# EAGLE board VCA-R2 (EAGLE 7.7.0)
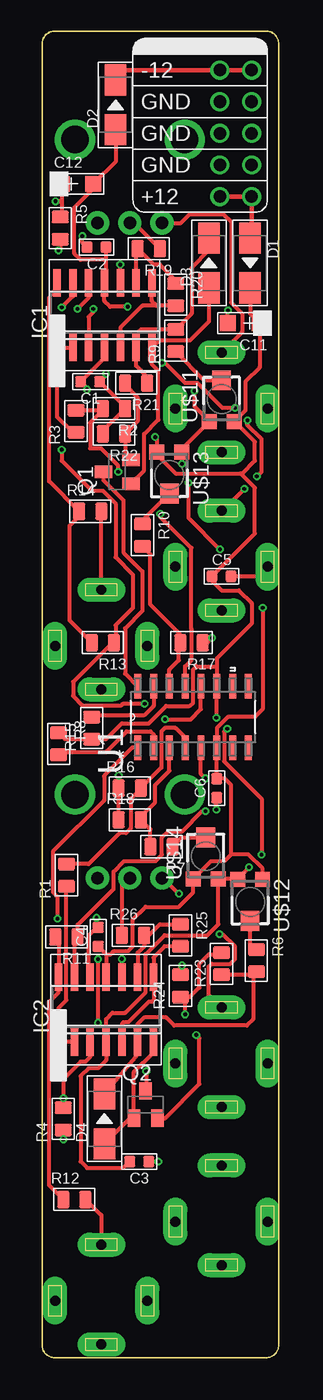
[diagram p0: board, top side]
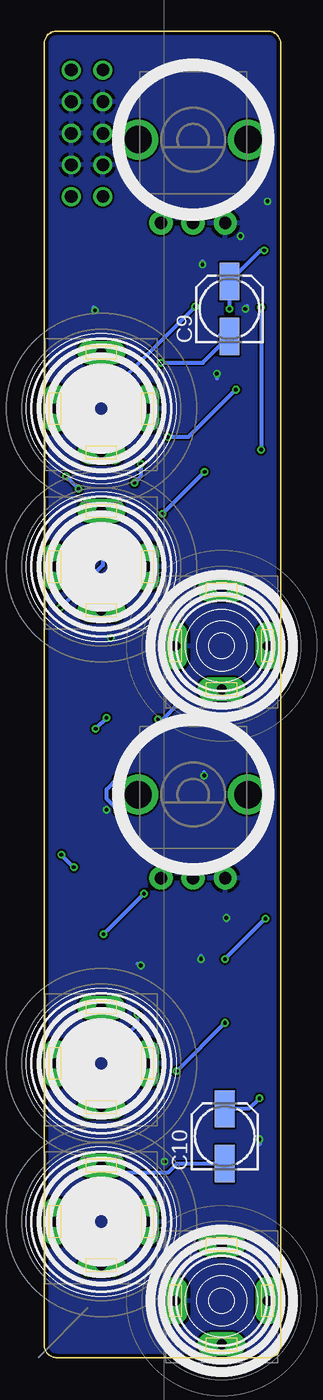
[diagram p1: board, bottom side, seen from below]

Size 18.98 x 106.5 mm. Coordinates in mm from the lower left corner, seen from the top.
Copper layers (1*16): Top 0.035mm / dielectric 1.5mm / Bottom 0.035mm
Design rules "ITEADstudio_DRC": minimum track width 6mil, minimum drill 12mil, track to track 6mil, track to pad 6mil, pad to pad 6mil, via to via 6mil, smd to smd 0mil, copper to edge 10mil, drill to drill 10mil, minimum pad ring 10mil, minimum via ring 6mil, stop-mask expansion 2mil, vias tented up to drill 100mil, thermal gap 10mil
Net classes: 0 default: width 0.305 mm; 1 heavypower: width 0.381 mm

## Footprints (pad centres in the part's own frame; a part is rotated, then mirrored left to right if it is on the bottom)
C0603 = smd 0.889 x 0.889: 1 -0.762,0; 2 0.762,0
153CLV-0505 = smd 3 x 1.6: + 2.2,0; - -2.2,0
AVX-A = smd 1.27 x 1.27: + -1.27,0; - 1.27,0
DO-214AC = smd 2.5 x 1.7: 1 -2,0; 2 2,0
SO14 = smd 0.6 x 2.2: 1 -3.81,-2.6; 2 -2.54,-2.6; 3 -1.27,-2.6; 4 0,-2.6; 5 1.27,-2.6; 6 2.54,-2.6; 7 3.81,-2.6; 8 3.81,2.6; 9 2.54,2.6; 10 1.27,2.6; 11 0,2.6; 12 -1.27,2.6; 13 -2.54,2.6; 14 -3.81,2.6
SOT23-BEC = smd 1 x 1.4: B -0.95,-1.1; C 0,1.1; E 0.95,-1.1
C0805 = smd 1.016 x 1.397: 1 -0.889,0; 2 0.889,0
SOIC127P620X175-16N = smd 1.981 x 0.559: 1 -2.464,4.445; 2 -2.464,3.175; 3 -2.464,1.905; 4 -2.464,0.635; 5 -2.464,-0.635; 6 -2.464,-1.905; 7 -2.464,-3.175; 8 -2.464,-4.445; 9 2.464,-4.445; 10 2.464,-3.175; 11 2.464,-1.905; 12 2.464,-0.635; 13 2.464,0.635; 14 2.464,1.905; 15 2.464,3.175; 16 2.464,4.445
OG-POTS_ALPS_POT_VERTICAL = drill 1 pad 1.88: P$1 -2.58,-6.7; P$2 0,-6.7; P$3 2.58,-6.7 | drill 2.2 pad 3.175: P$4 4.4,0; P$5 -4.4,0
3.5MM-JACK-SWITCH-13MM-INPUT = drill 0.8 pad 1.93 long: RING@3 -3.7,0; SECOND@3 0,-3.5; SWITCH@3 3.7,0; TIP@3 0,4.5
3.5MM-JACK-SWITCH-13MM-OUTPUT = drill 0.8 pad 1.93 long: RING@3 -3.7,0; SECOND@3 0,-3.5; SWITCH@3 3.7,0; TIP@3 0,4.5
POWER_10 = drill 1.016: 1 -5.08,-1.27; 2 -5.08,1.27; 3 -2.54,-1.27; 4 -2.54,1.27; 5 0,-1.27; 6 0,1.27; 7 2.54,-1.27; 8 2.54,1.27; 9 5.08,-1.27; 10 5.08,1.27
TC33X = smd 1.2 x 1.2: 1 -1,-1.825; 3 1,-1.825 | smd 1.5 x 1.6: 2 0,1.5

## Placement (x,y rotation side)
C1  100nF  [C0603]  3.86,78.36 180 top
C2  100nF  [C0603]  4.37,89.15 180 top
C3  100nF  [C0603]  7.8,15.75 180 top
C4  100nF  [C0603]  4.49,33.78 90 top
C5  100nF  [C0603]  14.4,62.74 0 top
C6  100nF  [C0603]  14.02,45.72 90 top
C9  1uF-BIDIR  [153CLV-0505]  4.11,84.2 90 bottom
C10  1uF-BIDIR  [153CLV-0505]  4.49,17.78 90 bottom
C11  10uF  [AVX-A]  16.18,83.06 180 top
C12  10uF  [AVX-A]  2.84,94.23 0 top
D1  MRA4004T3G  [DO-214AC]  16.69,87.88 270 top
D2  MRA4004T3G  [DO-214AC]  5.89,100.58 90 top
D3  MRA4004T3G  [DO-214AC]  13.38,87.88 90 top
D4  MRA4004T3G  [DO-214AC]  5,19.18 90 top
IC1  TL074D  [SO14]  5,83.69 0 top
IC2  TL074D  [SO14]  5.13,27.94 0 top
Q1  MMBT3906LT1SMD  [SOT23-BEC]  6.02,71.12 90 top
Q2  MMBT3906LT1SMD  [SOT23-BEC]  8.3,20.32 0 top
R1  49.9K  [C0805]  1.95,38.73 90 top
R2  499  [C0805]  5.76,76.2 180 top
R3  49.9K  [C0805]  2.72,75.18 90 top
R4  220K  [C0805]  1.7,19.18 90 top
R5  220K  [C0805]  1.45,90.68 270 top
R6  220K  [C0805]  17.19,31.88 270 top
R7  220K  [C0805]  9.57,41.02 180 top
R8  249K  [C0805]  1.32,49.28 270 top
R9  220K  [C0805]  10.72,81.66 90 top
R10  220K  [C0805]  8.05,66.04 270 top
R11  30.1K  [C0805]  1.95,33.78 180 top
R12  100  [C0805]  2.59,12.7 0 top
R13  30.1K  [C0805]  4.87,57.4 180 top
R14  100  [C0805]  3.86,67.94 0 top
R15  249K  [C0805]  3.99,50.55 90 top
R16  499  [C0805]  7.03,45.72 0 top
R17  499  [C0805]  11.99,57.4 180 top
R18  499  [C0805]  7.03,43.18 0 top
R19  100K  [C0805]  8.56,89.03 180 top
R20  2K  [C0805]  10.72,85.34 270 top
R21  2K  [C0805]  7.54,78.23 180 top
R22  200  [C0805]  5.76,74.17 180 top
R23  2K  [C0805]  14.4,31.62 90 top
R24  200  [C0805]  11.1,29.84 90 top
R25  2K  [C0805]  11.1,33.91 270 top
R26  100K  [C0805]  7.29,33.91 0 top
U1  LM13700M  [SOIC127P620X175-16N]  12.11,51.44 90 top
U$1  EURORACK_PCB4HP  [EURORACK4HPPCB]  19.48,0 0 bottom
U$2  100K  [OG-POTS_ALPS_POT_VERTICAL]  7.03,97.79 0 bottom
U$3  100K  [OG-POTS_ALPS_POT_VERTICAL]  7.03,45.21 0 bottom
U$4  PJ-341  [3.5MM-JACK-SWITCH-13MM-INPUT]  14.4,63.5 0 bottom
U$5  PJ-341  [3.5MM-JACK-SWITCH-13MM-INPUT]  14.4,76.2 0 bottom
U$6  PJ-341  [3.5MM-JACK-SWITCH-13MM-INPUT]  14.4,10.92 0 bottom
U$7  PJ-341  [3.5MM-JACK-SWITCH-13MM-INPUT]  14.4,23.62 0 bottom
U$8  PJ-341  [3.5MM-JACK-SWITCH-13MM-OUTPUT]  4.75,57.15 0 bottom
U$9  PJ-341  [3.5MM-JACK-SWITCH-13MM-OUTPUT]  4.75,4.57 0 bottom
U$10  POWER_SIMPLE10  [POWER_10]  15.54,98.3 270 top
U$11  100K  [TC33X]  14.4,76.96 0 top
U$12  100K  [TC33X]  16.69,36.58 180 top
U$13  100K  [TC33X]  10.21,70.87 180 top
U$14  100K  [TC33X]  13.13,40.26 0 top

## Library data of the parts
C1-C6 C11 C12 R1-R26 = OPL
C9 C10 U$11-U$14 = adafruit
D1-D4 = OPL; MF: VISHAY; MPN: US1G-E3/5AT; OC_FARNELL: 9551824
IC1 IC2 U$1 U$10 = EurorackModularParts
Q1 Q2 = transistor-pnp
U1 = FarnellThings; MPN: LM13700M; OC_FARNELL: 1468910; OC_NEWARK: 41K3505; PACKAGE: SOIC-16; SUPPLIER: National Semiconductor
U$2 = EurorackModularParts; DESC: Gain A
U$3 = EurorackModularParts; DESC: Gain B
U$4 = EurorackModularParts; DESC: Input A; MPN: PJ-341
U$5 = EurorackModularParts; DESC: CV A; MPN: PJ-341
U$6 = EurorackModularParts; DESC: Input B; MPN: PJ-341
U$7 = EurorackModularParts; DESC: CV B; MPN: PJ-341
U$8 = EurorackModularParts; DESC: Output A; MPN: PJ-341
U$9 = EurorackModularParts; DESC: Output B; MPN: PJ-341

## Nets
12V: C1.2 C3.2 C5.1 C11.+ D1.2 IC1.4 IC2.4 R8.1 R15.1 U1.11 U$11.3 U$12.3 U$13.3 U$14.3
-12V: C2.1 C4.1 C6.2 C12.- D2.1 IC1.11 IC2.11 U1.6 U$11.1 U$12.1 U$13.1 U$14.1
CV_IN_A: Q1.C U1.16
CV_IN_B: Q2.C U1.1
GND: C1.1 C2.2 C3.1 C4.2 C5.2 C6.1 C11.- C12.+ IC1.10 IC1.12 IC2.10 IC2.12 R2.1 R4.1 R5.1 R16.1 R17.1 R18.1 R22.2 R24.2 U$2.P$3 U$3.P$3 U$4.RING@3 U$4.SWITCH@3 U$5.RING@3 U$5.SWITCH@3 U$6.RING@3 U$6.SWITCH@3 U$7.RING@3 U$7.SWITCH@3 U$8.RING@3 U$9.RING@3 U$10.3 U$10.4 U$10.5 U$10.6 U$10.7 U$10.8
N$1: R14.2 U$8.TIP@3
N$2: IC1.14 R13.2 R14.1
N$3: R8.2 U1.2
N$4: R15.2 U1.15
N$5: R12.2 U$9.TIP@3
N$6: IC2.14 R11.2 R12.1
N$7: R19.1 U$2.P$2
N$8: R10.1 U$13.2
N$9: R9.1 U$11.2
N$10: R7.1 U$14.2
N$11: R6.1 U$12.2
N$12: C9.- U$4.TIP@3
N$13: C10.- U$6.TIP@3
N$14: C9.+ IC1.3 R5.2
N$15: C10.+ IC2.3 R4.2
N$16: IC1.1 IC1.2 R3.1
N$18: IC2.1 IC2.2 R1.1
N$19: R2.2 R3.2 U1.13
N$20: R1.2 R16.2 U1.4
N$21: R10.2 R17.2 U1.14
N$22: U$3.P$1 U$7.TIP@3
N$23: R7.2 R18.2 U1.3
N$24: U$2.P$1 U$5.TIP@3
N$25: IC1.9 R19.2 R20.1
N$26: IC1.5 IC1.8 R20.2
N$27: D3.2 IC1.6 R9.2 R21.1
N$28 [heavypower]: D1.1 U$10.9 U$10.10
N$29: D3.1 IC1.7 Q1.B
N$30: Q1.E R21.2 R22.1
N$32: D4.2 IC2.6 R6.2 R23.1
N$33: D4.1 IC2.7 Q2.B
N$34: Q2.E R23.2 R24.1
N$37: IC2.5 IC2.8 R25.2
N$38: R26.1 U$3.P$2
N$39: IC2.9 R25.1 R26.2
N$64 [heavypower]: D2.2 U$10.1 U$10.2
TRANS_OUT_A: IC1.13 R13.1 U1.12
TRANS_OUT_B: IC2.13 R11.1 U1.5

## Tracks (layer width: path | path; a pad name or v marks a point on that pad's centre or on a via)
12V  (via drill 0.3)
  Top 0.305: D1.2 16.69,83.82 C11.+ 17.45,79.5 16.3,78.36 16.3,76.04 U$11.3 15.46,75.14 17.07,73.53 17.07,72.01 16.05,70.99 15.92,70.99 | 14.02,55.5 14.02,56.13 16.81,58.93 16.81,60.58 15.8,61.59 14.4,61.59 13.64,62.36 C5.1 17.07,66.17 17.07,69.85 15.92,70.99 | 14.02,55.5 U1.11 13.98,53.75 v13.98,51.38 | R8.1 1.83,49.66 R15.1 5.13,49.66 6.4,50.93 8.56,50.93 9.95,52.32 11.86,52.32 12.11,52.58 12.11,55.24 12.37,55.5 14.02,55.5 | IC1.4 4.87,80.97 4.87,80.14 C1.2 3.6,77.85 v3.6,77.72 | C3.2 6.53,15.24 3.6,15.24 3.1,15.75 3.1,22.61 3.73,23.24 4.49,23.24 5.13,23.88 IC2.4 5.13,27.18 5.64,27.69 6.65,27.69 8.3,29.34 8.3,32.38 9.83,33.91 13.26,33.91 14.15,34.8 14.15,38.42 U$14.3 15.65,38.43 U$12.3 15.73,38.5 v16.6,39.38 | v9.07,73.91 9.21,73.77 U$13.3 9.21,72.5 10.72,70.99 15.92,70.99 | v17.6,40.38 17.6,44.88 14.6,47.88 14.6,50.25 v14.85,50.5
  Bottom 0.305: v3.6,77.72 7.41,73.91 v9.07,73.91 | v17.6,40.38 v16.6,39.38 | v13.98,51.38 v14.85,50.5
-12V  (via drill 0.3)
  Top 0.305: D2.1 5.89,96.01 C12.- 4.11,93.85 2.59,92.33 2.59,88.65 3.1,88.14 5,88.14 5.13,88.01 | C4.1 5.13,32.38 | 5.13,32.38 IC2.11 | 15.16,40.39 14.65,39.88 13.57,39.88 U$14.1 12.11,38.42 12.11,37.34 10.97,36.2 8.3,36.2 7.29,35.18 7.29,33.02 6.91,32.64 5.76,32.64 5.51,32.38 5.13,32.38 | 15.16,40.39 15.16,45.97 14.65,46.48 C6.2 U1.6 14.02,50.55 14.91,51.44 17.07,51.44 17.7,52.07 v17.7,60.2 | IC1.11 5.13,86.42 5.13,88.01 | 5.13,88.01 C2.1 | U$12.1 17.69,39.26 16.56,40.39 15.16,40.39 | v11.22,71.75 11.21,71.77 U$13.1 11.21,72.95 U$11.1 13.35,75.25 12.23,76.38 v12.23,77.62 | v11.73,70.23 11.73,67.44 v14.27,64.9 | 5.1,85.5 5.1,86.25 IC1.11 | v6.86,84.38 5.46,84.38 5,84.84 IC1.11
  Bottom 0.305: v14.27,64.9 14.27,63.63 v17.7,60.2 | v11.22,71.75 11.22,70.74 v11.73,70.23 | v6.86,84.38 12.23,79.01 v12.23,77.62
CV_IN_A
  Top 0.305: Q1.C 4.92,70.44 6.53,68.83 6.53,64.64 8.05,63.12 8.05,59.94 6.65,58.55 6.65,54.91 U1.16
CV_IN_B  (via drill 0.3)
  Top 0.305: U1.1 7.24,48.97 5,46.74 4.98,46.62 4.98,44.75 0.85,40.62 0.85,37.38 1.23,37 v1.23,35.25 | v8.35,23 8.35,21.5 Q2.C | v4.48,32 v4.48,26.88
  Bottom 0.305: v4.48,26.88 v8.35,23 | v1.23,35.25 v4.48,32
GND  (via drill 0.3)
  Top 0.305: C12.+ 1.57,92.71 | 1.57,92.71 1.57,91.69 R5.1 | C11.- v14.91,84.07 | R22.2 4.87,74.42 R2.1 6.65,76.33 C1.1 5.13,78.87 v5.13,78.99 | C5.2 17.34,62.74 U$4.RING@3 | IC2.12 3.73,30.67 3.73,33.91 4.37,34.54 | 4.37,34.54 C4.2 | 1.57,92.71 1.45,92.84 v1.06,92.84 | C2.2 3.22,89.53 v3.22,90.04 | IC1.12 3.73,85.09 v2.84,84.2 | IC1.10 v6.27,87.76 | R18.1 R16.1 v6.14,46.74 | R4.1 v1.7,17.53 | C3.1 v9.32,15.75 | R24.2 11.1,31.37 v11.22,31.5 | 4.37,34.54 v4.37,35.31 | IC2.10 v6.4,32 | v13.98,44 13.98,44.88 C6.1 | R17.1 13.26,57.4 v13.64,57.78
  Bottom 0.305: v14.91,84.07 14.91,84.2 15.03,84.33 | v1.06,92.84 0.94,92.84 | v3.22,90.04 3.22,90.17 | v2.84,84.2 2.84,84.33 2.72,84.45 | v6.27,87.76 6.27,88.01 | v1.7,17.53 1.7,17.14 | v9.32,15.75 9.45,15.88 | v11.22,31.5 11.35,31.5 11.48,31.62 | v4.37,35.31 4.49,35.31 | v6.4,32 6.4,32.26 | v5.13,78.99 5.13,78.61 | v6.14,46.74 6.14,46.99 | v13.64,57.78 13.76,57.78
  pour Bottom: -0.59,106.68 19.73,106.68 19.48,0 -0.84,0
N$1
  Top 0.305: U$8.TIP@3 R14.2
N$2
  Top 0.305: R13.2 2.21,59.18 2.21,66.8 2.97,67.56 R14.1 0.56,70.36 0.56,85.09 1.19,85.85 IC1.14
N$3
  Top 0.305: R8.2 1.57,48.64 5.13,48.64 6.78,50.29 8.68,50.29 8.94,50.04 U1.2
N$4
  Top 0.305: U1.15 8.94,52.32 8.18,51.56 3.99,51.56 R15.2
N$5
  Top 0.305: R12.2 4.75,11.43 U$9.TIP@3
N$6
  Top 0.305: R11.2 1.32,33.53 IC2.14 1.32,29.34 0.56,28.57 0.56,13.84 R12.1
N$7
  Top 0.305: R19.1 7.8,90.68 7.45,90.68 U$2.P$2
N$8
  Top 0.305: U$13.2 8.05,67.21 R10.1
N$9
  Top 0.305: U$11.2 13.03,78.46 R9.1
N$10
  Top 0.305: R7.1 11.2,41.76 U$14.2
N$11
  Top 0.305: R6.1 16.69,33.27 U$12.2
N$12  (via drill 0.3)
  Top 0.305: v9.6,79.88 9.85,79.88 11.48,78.25 12.48,78.25 14.48,76.25 v15.48,76.25 | v16.48,75.25 16.48,74.88 17.6,73.75 17.6,71.12 v17.23,70.75 | v16.23,69.75 14.48,68 U$4.TIP@3
  Bottom 0.305: 4.85,82.12 4.23,82.12 C9.- 6.24,79.88 v9.6,79.88 | v16.48,75.25 v15.48,76.25 | v16.23,69.75 v17.23,70.75
N$13
  Bottom 0.305: C10.- 8.34,15.58 9.07,14.86 13.84,14.86 U$6.TIP@3
N$14  (via drill 0.3)
  Top 0.305: R5.2 1.45,89.03 v1.32,88.9 | v4.11,84.2 4.11,83.95 3.73,83.57 IC1.3
  Bottom 0.305: v1.32,88.9 1.61,88.9 C9.+ v4.11,84.2
N$15  (via drill 0.3)
  Top 0.305: IC2.3 3.86,24.13 3.48,23.75 3.1,23.75 1.7,22.35 v1.7,20.83 R4.2
  Bottom 0.305: v1.7,20.83 2.55,19.98 C10.+
N$16
  Top 0.305: IC1.2 IC1.1 1.19,75.56 2.46,74.3 R3.1
N$18
  Top 0.305: IC2.2 IC2.1 1.32,28.07 1.95,28.7 R1.1
N$19  (via drill 0.3)
  Top 0.305: R3.2 4.75,76.07 R2.2 4.87,76.07 3.86,75.06 3.86,73.03 3.98,73 4.73,73 6.1,71.62 v6.1,71.12 | U1.13 11.48,55.5 11.99,56.01 11.99,58.42 11.98,58.5 11.98,65 9.48,67.5 v9.48,67.75
  Bottom 0.305: v9.48,67.75 v6.1,71.12
N$20
  Top 0.305: U1.4 11.48,49.78 10.72,50.55 9.83,50.55 9.57,50.29 9.57,47.37 R16.2 7.85,45.62 7.1,44.88 7.1,42.5 6.73,42.12 6.23,42.12 3.73,39.62 1.98,39.62 R1.2
N$21
  Top 0.305: U1.14 10.21,55.24 10.97,56.01 10.97,57.28 R17.2 11.1,58.04 8.68,60.45 8.68,64.52 R10.2
N$22  (via drill 0.3)
  Top 0.305: v10.98,37.25 9.73,38.5 U$3.P$1 | v14.23,34 14.48,34 15.48,33 15.48,32 15.1,31.62 13.6,31.62 13.35,31.38 13.35,29.12 14.35,28.12 U$7.TIP@3
  Bottom 0.305: v10.98,37.25 v14.23,34
N$23
  Top 0.305: R7.2 8.68,42.42 R18.2 7.92,43.43 9.07,44.58 9.07,45.97 10.21,47.12 U1.3
N$24
  Top 0.305: U$2.P$1 11.13,91.09 11.86,91.82 14.53,91.82 15.16,91.19 15.16,84.71 16.05,83.82 16.05,82.35 U$5.TIP@3
N$25
  Top 0.305: R20.1 10.72,86.49 9.45,87.76 8.94,87.76 R19.2 7.54,88.9 IC1.9
N$26
  Top 0.305: R20.2 9.19,84.45 | 9.19,84.45 8.81,84.84 IC1.8 | 9.19,84.45 8.05,84.45 6.27,82.68 IC1.5
N$27
  Top 0.305: D3.2 13.38,88.9 11.99,87.5 11.99,83.82 R9.2 7.92,82.55 7.67,82.3 7.67,81.22 IC1.6 7.54,79.63 8.43,78.74 R21.1
N$28
  Top 0.381: U$10.9 U$10.10 16.81,90.01 D1.1
N$29
  Top 0.305: D3.1 13.38,83.19 11.86,81.66 9.38,81.66 IC1.7 8.81,79.76 9.32,79.25 9.32,75.31 8.18,74.17 8.18,71.23 Q1.B
N$30
  Top 0.305: R21.2 6.65,78.11 7.67,77.09 7.67,75.18 R22.1 6.65,72.53 Q1.E
N$32
  Top 0.305: R6.2 16.94,30.73 | 16.94,30.73 R23.1 | 16.94,30.73 16.94,27.18 16.43,26.67 10.59,26.67 9.95,27.3 8.18,27.3 7.67,26.8 IC2.6 7.67,24.35 D4.2
N$33
  Top 0.305: D4.1 7.04,19.22 Q2.B 7.35,22.93 8.94,24.51 IC2.7
N$34  (via drill 0.3)
  Top 0.305: R23.2 14.27,32.38 13.38,32.38 12.62,31.62 12.62,29.72 11.86,28.96 R24.1 11.48,28.57 v11.48,27.56 | Q2.E 9.87,19.22 12.62,21.97 12.62,25.65 v12.37,25.91
  Bottom 0.305: v12.37,25.91 11.48,26.8 v11.48,27.56
N$37
  Top 0.305: R25.2 9.83,33.02 8.94,32.13 IC2.8 8.94,28.7 8.81,28.57 8.56,28.57 6.91,26.92 6.53,26.92 6.4,26.8 IC2.5
N$38
  Top 0.305: U$3.P$2 6.4,37.88 R26.1
N$39
  Top 0.305: 7.67,29.84 IC2.9 7.67,32.51 8.18,33.02 R26.2 8.56,33.91 9.45,34.8 R25.1
N$64
  Top 0.381: U$10.2 U$10.1 6.68,103.38 arc90 D2.2
TRANS_OUT_A  (via drill 0.3)
  Top 0.305: IC1.13 2.46,85.22 v1.57,84.33 | v1.57,72.9 1.57,72.01 3.99,69.6 4.87,69.6 5.89,68.58 5.89,64.26 7.29,62.87 7.29,60.2 5.89,58.8 5.89,57.53 R13.1 5.73,57.5 2.48,54.25 2.48,53.12 3.23,52.38 6.35,52.38 6.48,52.5 v8.23,52.5 | v9.85,51.25 11.93,51.25 12.75,52.07 U1.12
  Bottom 0.305: v1.57,84.33 v1.57,72.9 | v9.85,51.25 9.48,51.25 v8.23,52.5
TRANS_OUT_B  (via drill 0.3)
  Top 0.305: IC2.13 2.59,33.53 R11.1 2.85,33.88 2.85,34.75 5.73,37.62 5.73,39 6.6,39.88 9.1,39.88 9.6,40.38 9.6,41.75 10.1,42.25 11.23,42.25 12.85,43.88 v13.1,43.88 | v13.1,46.5 12.75,46.86 U1.5
  Bottom 0.305: v13.1,46.5 13.98,45.62 13.98,44.88 13.1,44 v13.1,43.88